# EAGLE board RTC_CLOCK_TIMER_STOPWATCH_1 (EAGLE 8.7.1)
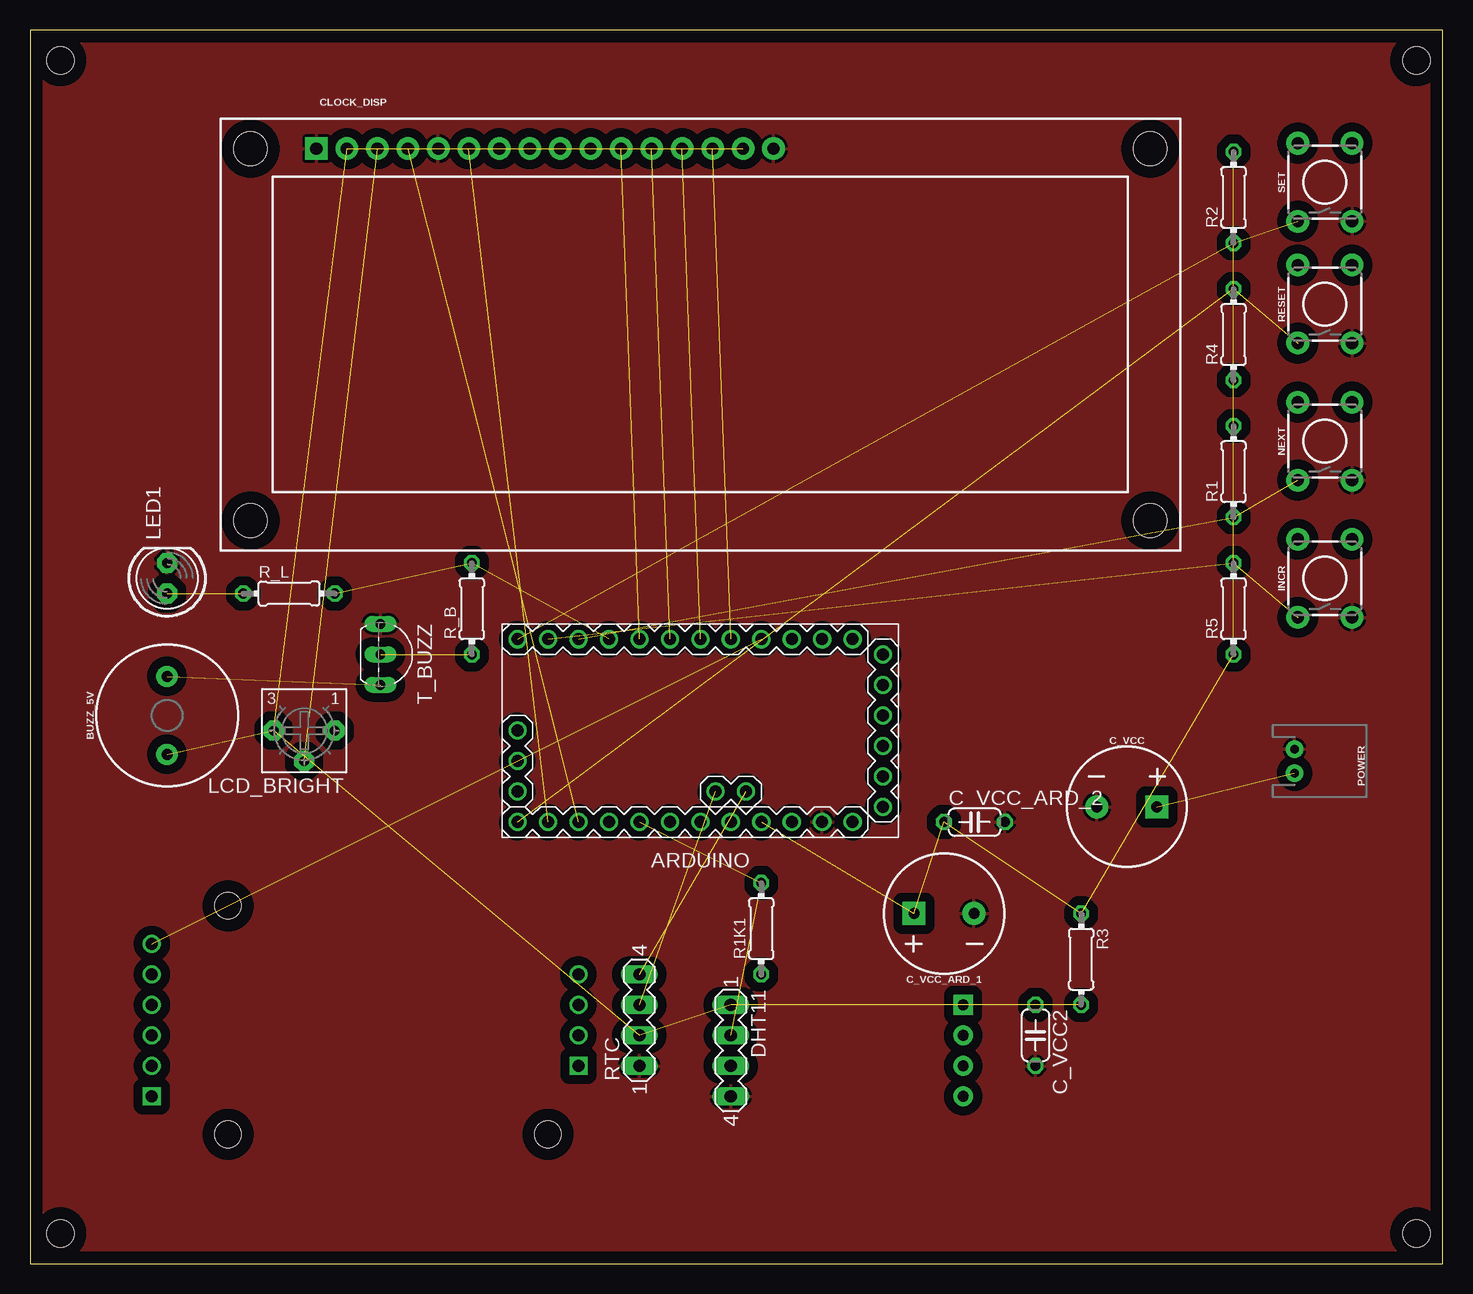
[diagram p0: board, top side]
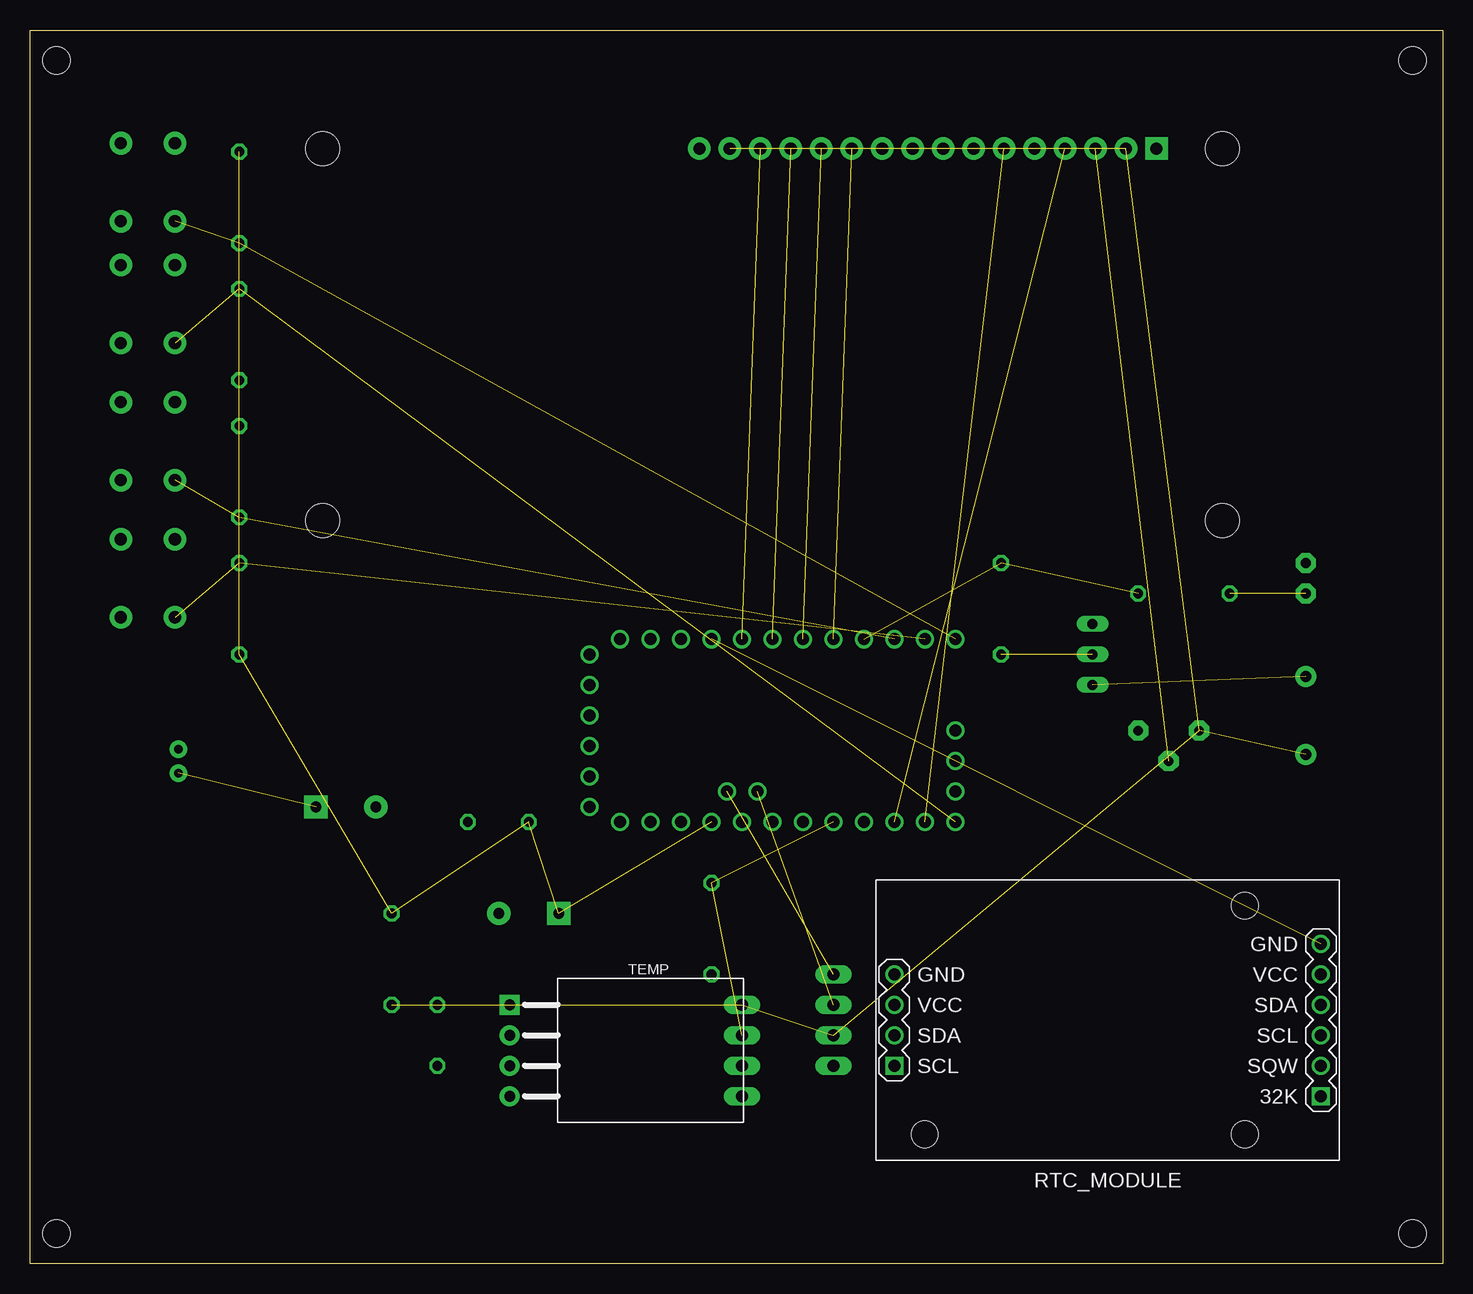
[diagram p1: board, bottom side, seen from below]

Size 117.78 x 102.86 mm. Coordinates in mm from the lower left corner, seen from the top.
Outline: 0,0 117.78,0 117.78,102.86 0,102.86 0,0
Copper layers (1*16): Top 0.035mm / dielectric 1.5mm / Bottom 0.035mm
Design rules "default *": minimum track width 30mil, minimum drill 1mm, track to track 30mil, track to pad 30mil, pad to pad 6mil, via to via 6mil, smd to smd 6mil, copper to edge 40mil, drill to drill 20mil, minimum pad ring 10mil, minimum via ring 8mil, stop-mask expansion 4mil, vias tented up to drill 0mil, thermal gap 10mil
Holes 2.29 mm at 2.54,100.33 115.57,100.33 115.57,2.54 2.54,2.54

## Footprints (pad centres in the part's own frame; a part is rotated, then mirrored left to right if it is on the bottom)
ARDUINO-PRO-MINI = drill 1: J1.1 -15.24,6.35; J1.2 -15.24,3.81; J1.3 -15.24,1.27; J1.4 -15.24,-1.27; J1.5 -15.24,-3.81; J1.6 -15.24,-6.35; J2.1 -1.27,5.08; J2.2 -3.81,5.08; J3.1 15.24,0; J3.2 15.24,2.54; J3.3 15.24,5.08; J6.1 -12.7,7.62; J6.2 -10.16,7.62; J6.3 -7.62,7.62; J6.4 -5.08,7.62; J6.5 -2.54,7.62; J6.6 0,7.62; J6.7 2.54,7.62; J6.8 5.08,7.62; J6.9 7.62,7.62; J6.10 10.16,7.62; J6.11 12.7,7.62; J6.12 15.24,7.62; J7.1 15.24,-7.62; J7.2 12.7,-7.62; J7.3 10.16,-7.62; J7.4 7.62,-7.62; J7.5 5.08,-7.62; J7.6 2.54,-7.62; J7.7 0,-7.62; J7.8 -2.54,-7.62; J7.9 -5.08,-7.62; J7.10 -7.62,-7.62; J7.11 -10.16,-7.62; J7.12 -12.7,-7.62
BUZZER-12MM = drill 0.9 pad 1.778: + 3.25,0; - -3.25,0
CPOL-RADIAL-5MM-10MM = drill 0.9 pad 1.93 square: + 2.5,0 | drill 0.9 pad 1.93: - -2.5,0
C050-024X044 = drill 0.813 octagon: 1 -2.54,0; 2 2.54,0
LCD-16X2 = drill 1.016 pad 1.88 square: 1 -32,15.5 | drill 1.016 pad 1.88: 2 -29.46,15.5; 3 -26.92,15.5; 4 -24.38,15.5; 5 -21.84,15.5; 6 -19.3,15.5; 7 -16.76,15.5; 8 -14.22,15.5; 9 -11.68,15.5; 10 -9.14,15.5; 11 -6.6,15.5; 12 -4.06,15.5; 13 -1.52,15.5; 14 1.02,15.5; 15 3.56,15.5; 16 6.1,15.5 | hole 2.8: -37.5,15.5; -37.5,-15.5; 37.5,15.5; 37.5,-15.5
MA04-1 = drill 1.016 long: 1 -3.81,0; 2 -1.27,0; 3 1.27,0; 4 3.81,0
TACTILE_SWITCH_PTH_6.0MM = drill 1.016 pad 1.88: 1 -3.251,2.261; 2 3.251,2.261; 3 -3.251,-2.261; 4 3.251,-2.261
3362P = drill 0.813 pad 1.676 octagon: 1 -2.54,0; 2 0,2.54; 3 2.54,0
LED5MM = drill 0.813 pad 1.676 octagon: A -1.27,0; K 1.27,0
JST-2-PTH-KIT = drill 0.7 pad 1.448: 1 -1,0; 2 1,0
0204/7 = drill 0.813 octagon: 1 -3.81,0; 2 3.81,0
RTC-DS3231-AT24C32 = drill 1 square: J1.1 -17.78,6.35; J2.1 17.78,3.81 | drill 1: J1.2 -17.78,3.81; J1.3 -17.78,1.27; J1.4 -17.78,-1.27; J1.5 -17.78,-3.81; J1.6 -17.78,-6.35; J2.2 17.78,1.27; J2.3 17.78,-1.27; J2.4 17.78,-3.81 | hole 2.2: -11.43,-9.525; -11.43,9.525; 15.24,9.525
TO92-EBC-OVAL = drill 0.813 long: B 0,-1.27; C 2.54,-1.27; E -2.54,-1.27
SNR4-2.54-15.5X12.0X5.5MM = drill 0.889 pad 1.651 square: 1 -11.75,3.81 | drill 0.889 pad 1.651: 2 -11.75,1.27; 3 -11.75,-1.27; 4 -11.75,-3.81

## Placement (x,y rotation side)
ARDUINO  ARDUINO-PRO-MINI-5.0V  [ARDUINO-PRO-MINI]  55.88,44.45 180 top
BUZZ_5V  BUZZER-PTH  [BUZZER-12MM]  11.43,45.72 90 top
C_VCC  1000mF  [CPOL-RADIAL-5MM-10MM]  91.44,38.1 0 top
C_VCC2  0.1  [C050-024X044]  83.82,19.05 270 top
C_VCC_ARD_1  470mF  [CPOL-RADIAL-5MM-10MM]  76.2,29.21 180 top
C_VCC_ARD_2  0.1  [C050-024X044]  78.74,36.83 0 top
CLOCK_DISP  LCD-16X2SILK  [LCD-16X2]  55.88,77.47 0 top
DHT11  DHT11  [MA04-1]  58.42,17.78 270 top
INCR  S  [TACTILE_SWITCH_PTH_6.0MM]  107.95,57.15 90 top
LCD_BRIGHT  10K  [3362P]  22.86,44.45 180 top
LED1  [LED5MM]  11.43,57.15 90 top
NEXT  S  [TACTILE_SWITCH_PTH_6.0MM]  107.95,68.58 90 top
POWER  5V  [JST-2-PTH-KIT]  105.41,41.91 270 top
R1  1K  [0204/7]  100.33,66.04 90 top
R1K1  1K  [0204/7]  60.96,27.94 90 top
R2  1K  [0204/7]  100.33,88.9 90 top
R3  1E  [0204/7]  87.63,25.4 270 top
R4  1K  [0204/7]  100.33,77.47 90 top
R5  1K  [0204/7]  100.33,54.61 90 top
R_B  1K  [0204/7]  36.83,54.61 90 top
R_L  100E  [0204/7]  21.59,55.88 0 top
RESET  S  [TACTILE_SWITCH_PTH_6.0MM]  107.95,80.01 90 top
RTC  [MA04-1]  50.8,20.32 90 top
RTC_MODULE  RTC-DS3231-AT24C32  [RTC-DS3231-AT24C32]  27.94,20.32 180 bottom
SET  S  [TACTILE_SWITCH_PTH_6.0MM]  107.95,90.17 90 top
T_BUZZ  BC187  [TO92-EBC-OVAL]  30.48,50.8 270 top
TEMP  TEMP  [SNR4-2.54-15.5X12.0X5.5MM]  66.04,17.78 0 bottom

## Library data of the parts
ARDUINO RTC_MODULE = diy-modules
BUZZ_5V = SparkFun-Electromechanical; PROD_ID: COMP-08253; SF_SKU: COM-07950
C_VCC C_VCC_ARD_1 = SparkFun-Capacitors; PROD_ID: CAP-09538
C_VCC2 C_VCC_ARD_2 = rcl; SPICEPREFIX: C
CLOCK_DISP = SparkFun-Displays; SF_ID: LCD-00255
DHT11 RTC = con-lstb; OC_FARNELL: unknown; OC_NEWARK: unknown
INCR NEXT RESET SET = SparkFun-Switches; PROD_ID: SWCH-08441; SF_SKU: COM-00097
LCD_BRIGHT = bourns
LED1 T_BUZZ = adafruit
POWER = SparkFun-Connectors
R1 R1K1 R2-R5 R_B R_L = rcl
TEMP = Seeed-Sensor; MPN: DHT11

## Nets
A4: ARDUINO.J2.1 RTC.3
A5: ARDUINO.J2.2 RTC.4
BUZZ_OUT: ARDUINO.J7.4 R_B.2 R_L.2
D4: ARDUINO.J7.5 CLOCK_DISP.11
D5: ARDUINO.J7.6 CLOCK_DISP.12
D6: ARDUINO.J7.7 CLOCK_DISP.13
D7: ARDUINO.J7.8 CLOCK_DISP.14
E: ARDUINO.J6.11 CLOCK_DISP.6
GND: ARDUINO.J6.2 C_VCC2.2 C_VCC.- C_VCC_ARD_1.- C_VCC_ARD_2.2 CLOCK_DISP.1 CLOCK_DISP.5 CLOCK_DISP.16 DHT11.4 INCR.3 LED1.K NEXT.3 POWER.1 RESET.3 RTC.1 SET.3 T_BUZZ.E
GND.1: ARDUINO.J7.9 RTC_MODULE.J1.6
GND.2: RTC_MODULE.J2.4
INCR: ARDUINO.J7.2 INCR.1 R5.2
LCD_BRIGHT: CLOCK_DISP.3 LCD_BRIGHT.2
N$4: R1K1.1
N$7: LCD_BRIGHT.1
N$9: R_B.1 T_BUZZ.B
N$10: BUZZ_5V.+ T_BUZZ.C
N$11: LED1.A R_L.1
NEXT: ARDUINO.J7.3 NEXT.1 R1.1
RAW: ARDUINO.J6.1
RESET: ARDUINO.J6.12 R4.2 RESET.1
RS: ARDUINO.J6.10 CLOCK_DISP.4
SET: ARDUINO.J7.1 R2.1 SET.1
TEMP_OUT: ARDUINO.J6.8 DHT11.2 R1K1.2
VCC: C_VCC.+ POWER.2
VCC.1: RTC_MODULE.J1.5
VCC.2: RTC_MODULE.J2.3
VCC_5V: BUZZ_5V.- C_VCC2.1 CLOCK_DISP.2 CLOCK_DISP.15 DHT11.1 LCD_BRIGHT.3 R3.2 RTC.2
VCC_ARDUINO: ARDUINO.J6.4 C_VCC_ARD_1.+ C_VCC_ARD_2.1 R1.2 R2.2 R3.1 R4.1 R5.1

## Tracks (layer width: path | path; a pad name or v marks a point on that pad's centre or on a via)
A4  (1 unrouted)
A5  (1 unrouted)
BUZZ_OUT  (2 unrouted)
D4  (1 unrouted)
D5  (1 unrouted)
D6  (1 unrouted)
D7  (1 unrouted)
E  (1 unrouted)
GND
  pour Top: 0,102.87 118.11,102.87 118.11,0 0,0
GND.1  (1 unrouted)
INCR  (2 unrouted)
LCD_BRIGHT  (1 unrouted)
N$9  (1 unrouted)
N$10  (1 unrouted)
N$11  (1 unrouted)
NEXT  (2 unrouted)
RESET  (2 unrouted)
RS  (1 unrouted)
SET  (2 unrouted)
TEMP_OUT  (2 unrouted)
VCC  (1 unrouted)
VCC_5V  (7 unrouted)
VCC_ARDUINO  (7 unrouted)